# EAGLE board Kaya (EAGLE 8.5.0)

Size 51.37 x 31.2 mm. Coordinates in mm from the lower left corner, seen from the top.
Outline: 0.07,26.8 0,5.11 arc90 5.09,0 46.15,0 arc90 51.3,5.13 51.37,26.45 arc90 46.64,31.2 4.48,31.2 arc90 0.07,26.8
Copper layers (1*16): Top 0.035mm / dielectric 1.5mm / Bottom 0.035mm
Design rules "default": minimum track width 6mil, minimum drill 0.35mm, track to track 6mil, track to pad 6mil, pad to pad 6mil, via to via 6mil, smd to smd 6mil, copper to edge 40mil, drill to drill 6mil, minimum pad ring 10mil, minimum via ring 8mil, stop-mask expansion 4mil, vias tented up to drill 0mil, thermal gap 10mil
tKeepout: area 24.6,7.5 to 37.7,22
bKeepout: area 24.6,7.5 to 37.7,22
tRestrict: area 24.6,7.5 to 37.7,22
bRestrict: area 24.6,7.5 to 37.7,22
vRestrict: area 24.6,7.5 to 37.7,22
Milling: area 24.8,7.8 to 37.5,21.5

## Footprints (pad centres in the part's own frame; a part is rotated, then mirrored left to right if it is on the bottom)
0603 = smd 1.1 x 1: 1 -0.85,0; 2 0.85,0
LED-0603 = smd 1 x 1: A -0.877,0; C 0.877,0
SMD1,27-2,54 = smd 1.27 x 2.54: 1 0,0
MA03-1 = drill 1.016 long: 1 -2.54,0; 2 0,0; 3 2.54,0
SOT23-5 = smd 1.2 x 0.6: 1 -1.306,0.95; 2 -1.306,0; 3 -1.306,-0.95; 4 1.306,-0.95; 5 1.306,0.95
LGA-24-3.5X3 = smd 0.27 x 0.45: 1 -1.505,1.225; 6 -1.505,-1.225; 7 -1.075,-1.225; 8 -0.645,-1.225; 9 -0.215,-1.225; 10 0.215,-1.225; 11 0.645,-1.225; 12 1.075,-1.225; 13 1.505,-1.225; 18 1.505,1.225; 19 1.075,1.225; 20 0.645,1.225; 21 0.215,1.225; 22 -0.215,1.225; 23 -0.645,1.225; 24 -1.075,1.225 | smd 0.45 x 0.27: 2 -1.475,0.645; 3 -1.475,0.215; 4 -1.475,-0.215; 5 -1.475,-0.645; 14 1.475,-0.645; 15 1.475,-0.215; 16 1.475,0.215; 17 1.475,0.645
INDUCTIVE-CHARGE-5V = smd 3 x 3: IN_L -3.33,10.33; IN_R 3.33,10.32; OUT+ 2.42,-10.42; OUT- -2.41,-10.43
BLE-NANO-PKG = smd 1.778 x 0.914: A3 7.75,4.375; A4 7.75,1.75; GND$6 -7.75,-3.5; GND$8 7.75,-0.875; RXD -7.75,1.75; SCL -7.75,-0.875; SDA -7.75,7; SWCLK 7.75,9.625; SWDIO 7.75,7; TXD -7.75,4.375; VDD -7.75,9.625; VIN 7.75,-3.5 | smd 0.914 x 1.778: P06 2.65,-4.95; P07 5.45,-4.95; P15 0,-4.95; P28 -5.45,-4.95; P29 -2.65,-4.95
CONDUCTIVE-BUTTON = smd 5 x 5: 1 0,0

## Placement (x,y rotation side)
C1  4.7uF  [0603]  14.49,10.99 90 top
C2  4.7uF  [0603]  17.87,10.99 90 top
C3  10uF  [0603]  17.18,23.46 0 top
C4  0.1uF  [0603]  17.18,17.84 0 top
C5  0.1uF  [0603]  21.01,18.5 270 top
C6  0.1uF  [0603]  17.18,20.65 0 top
C7  10nF  [0603]  20.78,22.78 90 top
D1  GREEN  [LED-0603]  31.87,25.77 0 top
D2  RED  [LED-0603]  31.87,28.34 0 top
PAD1  WIREPADSMD1,27-254  [SMD1,27-2,54]  10.68,24.7 0 bottom
PAD2  WIREPADSMD1,27-254  [SMD1,27-2,54]  4.08,24.8 0 bottom
PAD3  WIREPADSMD1,27-254  [SMD1,27-2,54]  18.11,3.96 0 top
POWER_SWITCH  [MA03-1]  46.17,23.47 270 top
R1  1k  [0603]  36.13,27.38 270 top
R2  1k  [0603]  28.02,25.62 90 top
R3  10k  [0603]  24.48,27.49 0 top
R4  10k  [0603]  45.34,15.99 0 top
R5  10k  [0603]  45.34,12.2 0 top
U1  MCP73832T-2ACI/OT  [SOT23-5]  25.68,24.69 0 top
U2  LSM9DS1  [LGA-24-3.5X3]  19.7,26.8 270 top
U$1  INDUCTIVE-CHARGE-5V  [INDUCTIVE-CHARGE-5V]  7.51,14.44 0 top
U$2  BLE-NANO  [BLE-NANO-PKG]  31.14,10.87 0 top
U$3  CONDUCTIVE-BUTTON  [CONDUCTIVE-BUTTON]  15.98,18 180 bottom
U$4  CONDUCTIVE-BUTTON  [CONDUCTIVE-BUTTON]  43.98,18 0 bottom
U$5  CONDUCTIVE-BUTTON  [CONDUCTIVE-BUTTON]  29.98,4 0 bottom

## Library data of the parts
C1 C2 = SparkFun-Capacitors; PROD_ID: CAP-08280
C3 = SparkFun-Capacitors; PROD_ID: CAP-11015
C4-C6 = SparkFun-Capacitors; PROD_ID: CAP-00810
C7 = SparkFun-Capacitors; PROD_ID: CAP-00867
D1 = SparkFun-LED; PROD_ID: DIO-00821
D2 = SparkFun-LED; PROD_ID: DIO-00819
PAD1-PAD3 = wirepad
POWER_SWITCH = con-lstb; OC_FARNELL: unknown; OC_NEWARK: unknown
R1 R2 = SparkFun-Resistors; PROD_ID: RES-07856
R3-R5 = SparkFun-Resistors; PROD_ID: RES-00824
U1 = MCP73832T-2ACI_OT; AVAILABILITY: Unavailable; MF: Microchip; MP: MCP73832T-2ACI-OT; PACKAGE: SOT-23-5 Microchip; PRICE: None
U2 = SparkFun-Sensors; PROD_ID: IC-12536
U$1 U$3-U$5 = tex-tronics
U$2 = BLE-NANO

## Nets
GND: C1.2 C2.2 C3.2 C4.2 C5.2 C6.2 C7.2 D1.C R3.1 U1.2 U2.14 U2.15 U2.16 U2.17 U2.18 U2.19 U2.20 U$1.OUT-
N$1: R3.2 U1.5
N$2: C2.1 D2.A U1.4 U$1.OUT+
N$3: R4.1 R5.1 U$2.GND$8
N$4: R4.2 U$2.A3 U$3.1
N$5: PAD3.1 U$2.GND$6
N$6: R5.2 U$2.A4 U$4.1
N$7: D2.C R1.1
N$8: R1.2 R2.2 U1.1
N$9: D1.A R2.1
N$10: PAD1.1 U$1.IN_R
N$11: PAD2.1 U$1.IN_L
N$12: C5.1 U2.24
N$14: C7.1 U2.21
N$16: U2.4 U$2.SDA
N$17: U2.2 U$2.SCL
VBAT: C1.1 POWER_SWITCH.3 U1.3
VDD: C3.1 C4.1 C6.1 U2.1 U2.3 U2.22 U2.23 U$2.VDD
VIN: POWER_SWITCH.1 U$2.VIN U$5.1

## Tracks (layer width: path | path; a pad name or v marks a point on that pad's centre or on a via)
GND  (17 unrouted)
N$1  (1 unrouted)
N$2  (3 unrouted)
N$3  (2 unrouted)
N$4  (2 unrouted)
N$5  (1 unrouted)
N$6  (2 unrouted)
N$7  (1 unrouted)
N$8  (2 unrouted)
N$9  (1 unrouted)
N$10  (1 unrouted)
N$11  (1 unrouted)
N$12  (1 unrouted)
N$14  (1 unrouted)
N$16  (1 unrouted)
N$17  (1 unrouted)
VBAT  (2 unrouted)
VDD  (7 unrouted)
VIN  (2 unrouted)

## Text on the board
tPlace: C:/Users/mcons/Downloads/kTq6gCz2.bmp
tSilk: ON | CRG | A3 | A4 | VIN
200bmp: C:/Users/mcons/Downloads/kTq6gCz2.bmp